# Altium PCB cs301_Team_15.PcbDoc
Units mm, origin at the board's own origin, x right, y up, seen from the top; angles counter-clockwise.
Board outline 87.88 x 127 mm, 2 copper layers (Top Layer, Bottom Layer); 44 components, 34 nets, 150 pads, 1 vias.
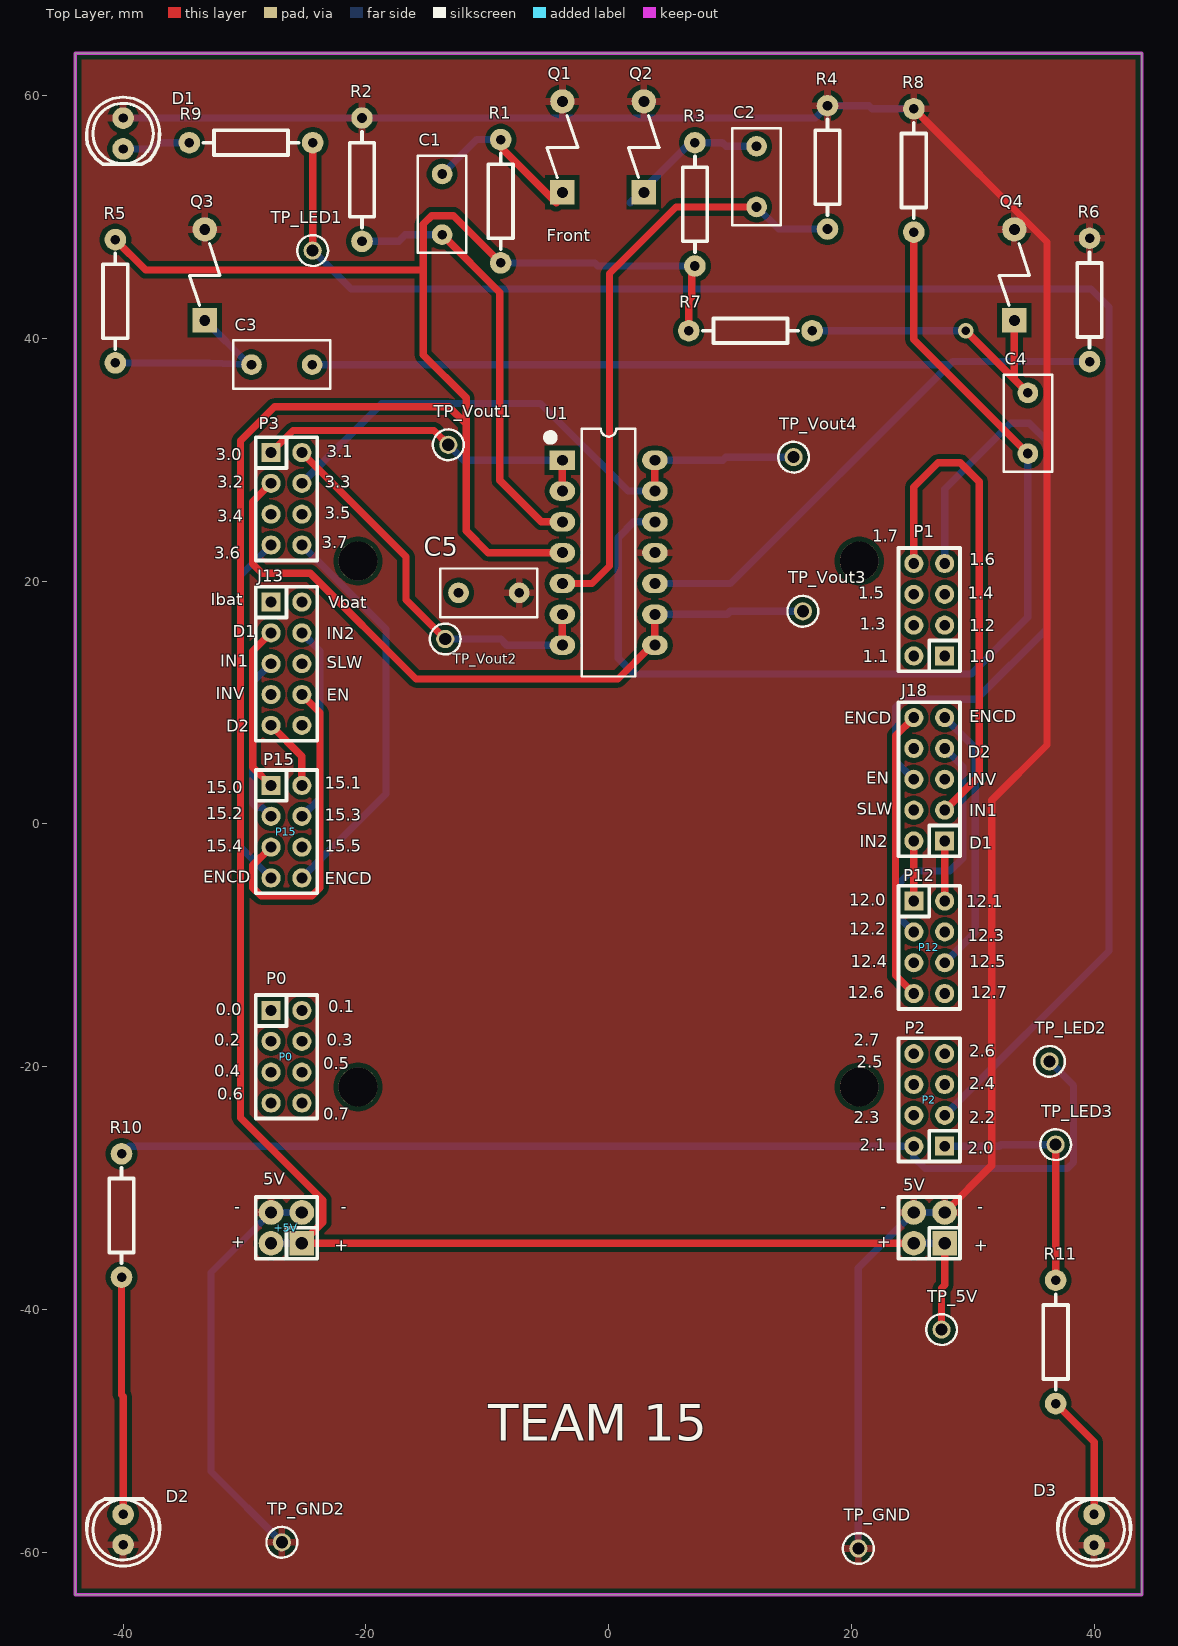
[diagram p0: Top Layer view]
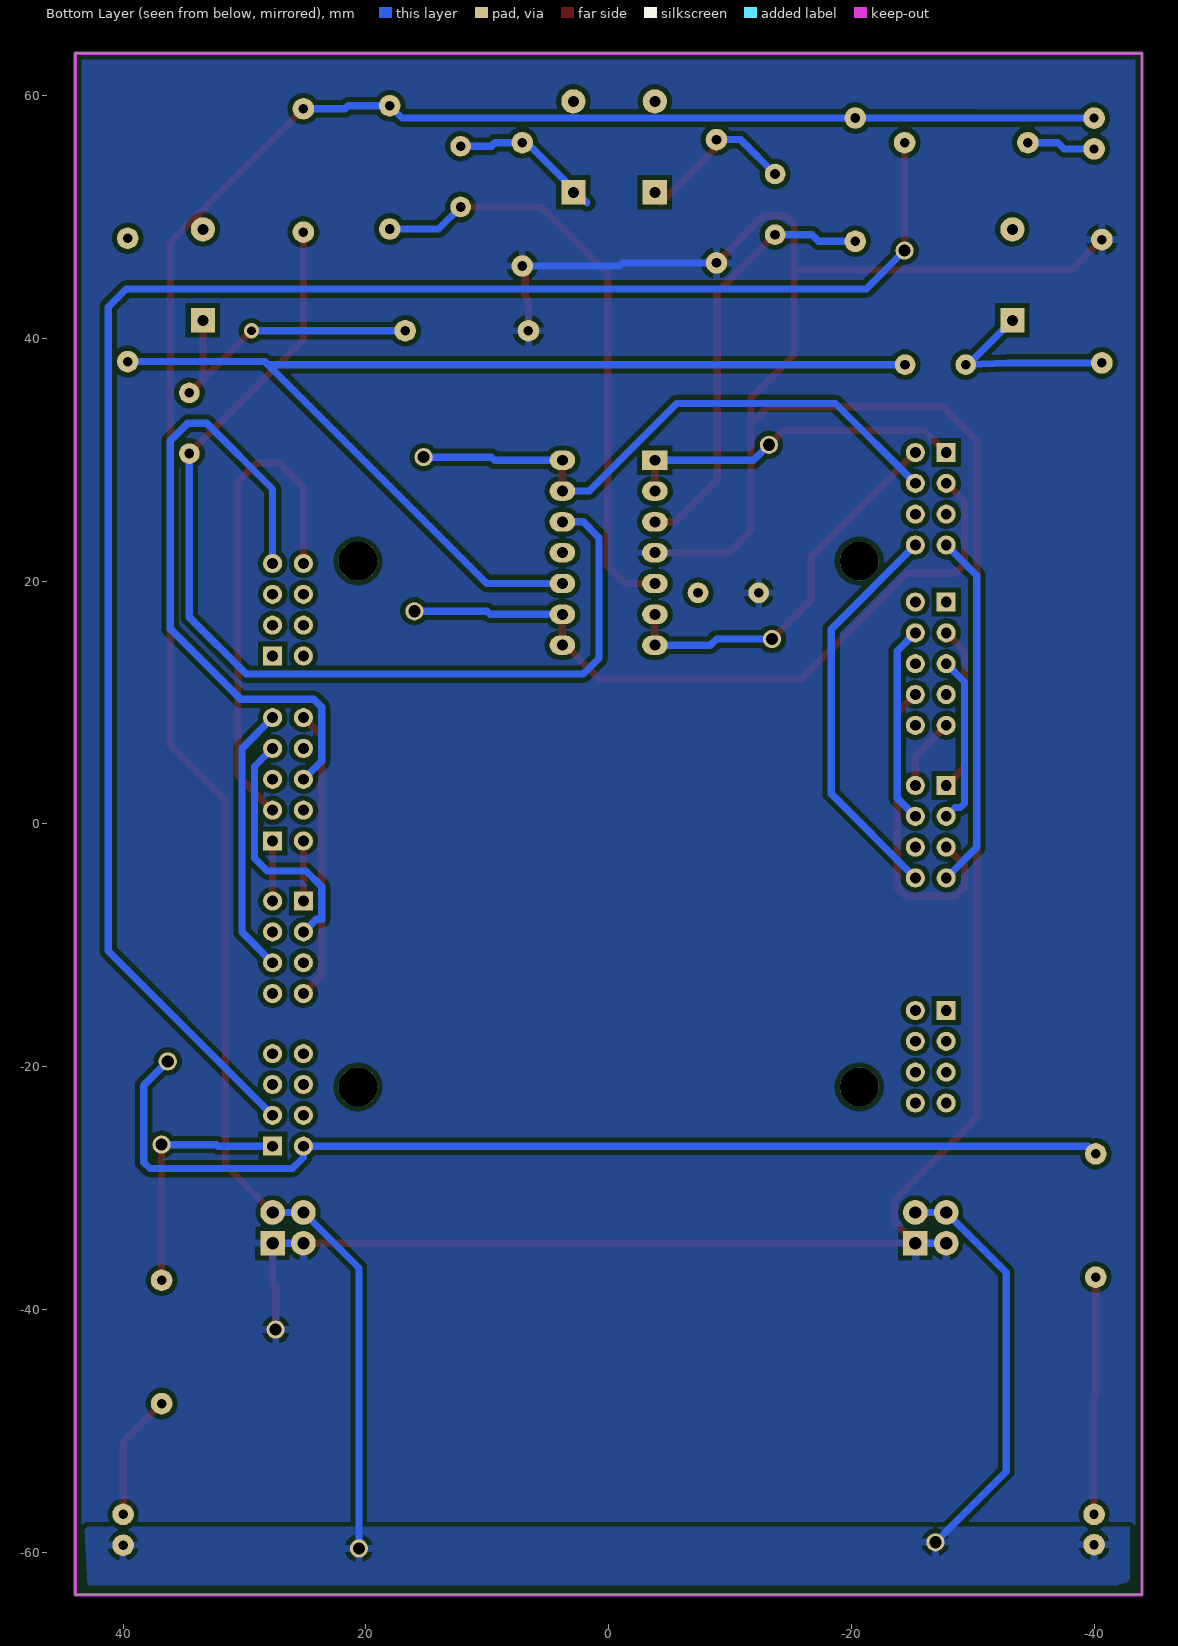
[diagram p1: Bottom Layer view, seen from below]

## Layer stack, top to bottom
Top Solder: solder mask 0.0102, Solder Resist, Dk 3.5
Top Layer: signal copper 0.0356
Dielectric1: dielectric 0.32, FR-4, Dk 4.8
Bottom Layer: signal copper 0.0356
Bottom Solder: solder mask 0.0102, Solder Resist, Dk 3.5

## Board outline
-43.942,-63.5 -43.942,63.5 43.942,63.5 43.942,-63.5

## Design rules (kind name [scope] priority, off if disabled: settings)
Clearance [All] p1: gap=0.4 ignorepadtopadclearanceinfootprint=FALSE
HoleSize [All] p1: absolutevalues=TRUE maxlimit=10 minlimit=0.4 maxpercent=80.000 minpercent=20.000
PolygonConnect [All] p1: connectstyle=Relief reliefconductorwidth=0.6 reliefentries=4 polygonreliefangle="90 Angle" airgapwidth=0.4
RoutingVias [All] p1: holewidth=0.711 width=1.27 viastyle="Through Hole" minholewidth=0.711 minwidth=1.27 maxholewidth=0.711 maxwidth=1.27
SilkToSilkClearance [All] p1: silktosilkclearance=0.1
SilkToSolderMaskClearance SilkscreenOverComponentPads [IsPad] p1: minsilkscreentomaskgap=0.1 clearancetoexposedcopper=TRUE
SolderMaskExpansion [All] p1: expansion=0.102 istentingtop=FALSE
Width [All] p1: maxlimit=10 minlimit=0.4 preferedwidth=0.6
27 further rules are at their usual default settings.

## Components (designator, comment, footprint, x,y, rotation, side; value= is the part's Value field where it differs from the comment)
5V "5V" IDC4 27.686,-34.544 r90 top locked
+5V "5V" IDC4 -25.273,-34.544 r90 top locked
C1 "100n" CCAP-5P0 -13.716,51.054 r270 top
C2 "100n" CCAP-5P0 12.192,53.34 r270 top
C3 "100n" CCAP-5P0 -26.924,37.846 r0 top
C4 "100n" CCAP-5P0 34.544,33.02 r270 top
C5 "1n" CCAP-5P0 -9.866,19.05 r0 top
D1 "LED" LED0.1/5MM#1 -40,55.62 r180 top locked
D2 "LED" LED0.1/5MM#2 -40,-56.88 r0 top locked
D3 "LED" LED0.1/5MM#1 40,-56.88 r0 top locked
J13 "CON10" IDC10 -27.813,18.288 r270 top locked
J18 "CON10" IDC10 27.686,-1.397 r90 top locked
P0 "P0" idc8 -27.813,-15.367 r270 top locked
P1 "P1" idc8 27.686,13.843 r90 top locked
P2 "P2" idc8 27.686,-26.543 r90 top locked
P3 "P3" idc8 -27.813,30.607 r270 top locked
P12 "P12" idc8 25.146,-6.35 r270 top locked
P15 "P15" IDC8 -27.813,3.175 r270 top locked
Q1 "VEMT3700" VEMT3700 0,49.501 r90 top
Q2 "VEMT3700" VEMT3700 6.708,49.501 r90 top
Q3 "VEMT3700" VEMT3700 -29.464,38.96 r90 top
Q4 "VEMT3700" VEMT3700 37.234,38.96 r90 top
R1 "51K" AXIAL0.4 -8.89,56.388 r270 top
R2 "33K" AXIAL0.4 -20.32,58.166 r270 top
R3 "51K" AXIAL0.4 7.112,56.134 r270 top
R4 "33K" AXIAL0.4 18.034,59.182 r270 top
R5 "51K" AXIAL0.4 -40.64,37.989 r90 top
R6 "33K" AXIAL0.4 39.624,48.26 r270 top
R7 "51K" AXIAL0.4 16.764,40.64 r180 top
R8 "33K" AXIAL0.4 25.146,58.928 r270 top
R9 "150" AXIAL0.4 -34.544,56.134 r0 top
R10 "150" AXIAL0.4 -40.132,-37.338 r90 top
R11 "150" AXIAL0.4 36.83,-37.592 r270 top
TP_5V "5003" TP_TH 27.432,-41.656 r90 top
TP_GND "5003" TP_TH 20.574,-59.69 r90 top
TP_GND2 "5003" TP_TH -26.924,-59.182 r90 top
TP_LED1 "5003" TP_TH -24.384,47.244 r90 top
TP_LED2 "5003" TP_TH 36.322,-19.558 r90 top
TP_LED3 "5003" TP_TH 36.83,-26.416 r90 top
TP_Vout1 "5003" TP_TH -13.208,31.242 r90 top
TP_Vout2 "5003" TP_TH -13.462,15.24 r90 top
TP_Vout3 "5003" TP_TH 16.002,17.526 r90 top
TP_Vout4 "5003" TP_TH 15.24,30.226 r90 top
U1 "LM324" DIP-14 0,22.352 r0 top

## Footprints (in the part's own frame and the unit in brackets; to place one, negate y for a bottom-side part, rotate by r counter-clockwise, add the part's x,y. Pads: shape width x height; smd on the part's side, far side on the other; paste and mask are expansions set on the pad)
AXIAL0.4 [mil]
  round 70 hole 31: 1(0,0) 2(400,0)
  silkscreen extent 45,-40 355,40
CCAP-5P0 [mm]
  round 1.7 hole 0.8: 1(-2.5,0) 2(2.5,0)
  silkscreen extent -4,-2 4,2, body extent -3.25,-1.5 3.25,1.5, height 6.5
DIP-14 [mm] "DIP; 14 Leads; Row Spacing 7.62 mm; Pitch 2.54 mm"
  rect 2.1x1.6 hole 0.9: 1(-3.81,7.62)
  oval 2.1x1.6 hole 0.9: 2(-3.81,5.08) 3(-3.81,2.54) 4(-3.81,0) 5(-3.81,-2.54) 6(-3.81,-5.08) 7(-3.81,-7.62) 8(3.81,-7.62) 9(3.81,-5.08) 10(3.81,-2.54) 11(3.81,0) 12(3.81,2.54) 13(3.81,5.08) 14(3.81,7.62)
  silkscreen extent -5.1,-10.2 2.2,10.2, body extent -5.07,-10.2 5.09,10.12, height 9.47
IDC4 [mil]
  rect 80x80 hole 40: 1(0,0)
  round 80 hole 40: 2(0,100) 3(100,0) 4(100,100)
  silkscreen extent -50,-50 150,150
idc8 [mil]
  rect 62x62 hole 35: 1(0,0)
  round 62 hole 35: 2(0,100) 3(100,0) 4(100,100) 5(200,0) 6(200,100) 7(300,0) 8(300,100)
  silkscreen extent -50,-50 350,150
IDC8 [mil]
  rect 62x62 hole 35: 1(0,0)
  round 62 hole 35: 2(0,100) 3(100,0) 4(100,100) 5(200,0) 6(200,100) 7(300,0) 8(300,100)
  silkscreen extent -50,-50 350,150
IDC10 [mil]
  rect 62x62 hole 35: 1(0,0)
  round 62 hole 35: 2(0,100) 3(100,0) 4(100,100) 5(200,0) 6(200,100) 7(300,0) 8(300,100) 9(400,0) 10(400,100)
  silkscreen extent -50,-50 450,150
LED0.1/5MM#1 [mil]
  round 70 hole 30: A(0,0) K(0,-100)
  silkscreen extent -118,-168 118,50
LED0.1/5MM#2 [mil]
  round 70 hole 30: A(0,0) K(0,-98.42)
  silkscreen extent -118,-168 118,50
TP_TH [mm] "Test Point, Through Hole, Dia 2.54mm"
  round 1.5 hole 1: 1(0,0)
  silkscreen extent -1.27,-1.27 1.27,1.27, body extent -1.27,-1.27 1.27,1.27, height 4.57
VEMT3700 [mm]
  rect 2x2 hole 0.9: 1(2.54,3.81)
  round 2 hole 0.9: 2(10.033,3.81)
  silkscreen extent 3.77,2.54 8.87,5.08

## Part data
5V +5V: library part CON4, "Connector"
C1 C2 C3 C4 C5: library part CerCap_TH_5P0, "TH ceramic capacitor with 5mm pitch"
J13 J18: "Connector"
P0 P1 P2 P3: library part CON8, "Connector"
P12 P15: library part CON8_1, "Connector"
Q1 Q2 Q3 Q4: "Silicon NPN Phototransistor"
R1 R2 R3 R4 R5 R6 R7 R8 R9 R10 R11: library part RES2
TP_5V TP_GND TP_GND2 TP_LED1 TP_LED2 TP_LED3 TP_Vout1 TP_Vout2 TP_Vout3 TP_Vout4: library part TestPoint, "Test Point, Orange, 1-Pin THD, RoHS", Forward Current="3 A", Forward Voltage="1.08 V", Max Operating Temperature="150 degC", Max Surge Current="80 A", Min Operating Temperature="-65 degC", Package Quantity=500, Peak Reverse Current="600 uA", ComponentLink1Description="Manufacturer URL", ComponentLink1URL=http://www.keyelco.com/, ComponentLink2Description=Datasheet, ComponentLink2URL=http://keyelco.com/userAssets/file/M65p56.pdf, DatasheetVersion=Jun-15, Diameter="5.3 mm", Height="0.25 inch", Length="9.5 mm", Mount="Through Hole", PackageDescription="1-Pin Through Hole Device, Dia 2.54 mm", PackageReference=5003, Packaging=Bulk, Pins=2, Radiation Hardening=No, REACH SVHC="No SVHC", RoHSCompliant=true, Weight="0.01 lb", Width="0.25 inch"
U1: library part LM324N_TH_DIP16, "IC OPAMP GP 14DIP", Current - Supply=1mA, Manufacturer="ON Semiconductor", Manufacturer Part Number=LM324N, Operating Temperature="0°C ~ 70°C", Package / Case="14-DIP (0.300\", 7.62mm)", Supplier Device Package=14-DIP, Supplier Part Number 1=LM324NFS-ND, Voltage - Supply, Single/Dual (±)="3 V ~ 32 V, ±1.5 V ~ 16 V", Amplifier Type="General Purpose", Base Part Number=LM324, Category="Integrated Circuits (ICs)", ComponentLink1Description=https://www.fairchildsemi.com/datasheets/LM/LM2902.pdf, ComponentLink1URL=https://www.fairchildsemi.com/datasheets/LM/LM2902.pdf, Mounting Type="Through Hole", Output Type=-, Packaging=Tube, Part Status=Active, Pricing 1="1=0.9, 10=0.775, 100=0.5789, 500=0.45482, 1000=0.35145 (NZD)", RoHS="RoHS Compliant", Slew Rate=-, Stock 1=2900, Supplier 1=Digi-Key

## Free pads (board coordinates)
  round 3.2 hole 3.2 unplated: 1(-20.65,-21.666) 1(-20.65,21.666) 1(20.65,-21.666) 1(20.65,21.666)

## Via types
v1: diameter 1.27, hole 0.711, Top Layer to Bottom Layer, 1 vias

## Nets (pads, with @x,y where several pads share a name; then routed paths per layer and width w, separated by ;. In a path a pad name is that pad's centre, name@x,y a point inside that pad or via, vN(x,y) a via of type N, cw(c..) or ccw(c..) an arc to the next point about the centre after c; other vN are vias at no path point)
+5V: 5V.1 5V.2 +5V.1 +5V.2 C5.1 R1.2 R3.2 R5.2 R7.2 TP_5V.1 U1.4 | length 244.1
  Top Layer w0.6: R5.2 -38.143,45.652 -15.268,45.652 ; R1.2 -12.784,50.122 -14.582,50.122 -15.268,49.436 -15.268,45.652 ; U1.4 -9.931,22.352 -11.738,24.159 -11.738,32.952 ; R7.2 6.604,43.162 6.858,43.416 R3.2@6.858,45.974 ; 5V.2 +5V.1 -23.549,-32.82 -23.549,-30.98 -30.33,-24.198 -30.33,31.58 -27.536,34.374 -13.16,34.374 -11.738,32.952 ; TP_5V.1 27.432,-38.245 27.686,-37.991 5V.1 ; -15.268,45.652 -15.268,38.641 -11.738,35.111 -11.738,32.952
  Bottom Layer w0.6: +5V.2 +5V.1 ; R1.2 -1.146,46.228 -0.892,45.974 R3.2@6.858,45.974 ; 5V.2 5V.1
D1A: J18.1 P12.2 | length 5
  Top Layer w0.6: P12.2 J18.1
D1B: J13.3 P15.1 | length 13.8
  Top Layer w0.6: P15.1 -29.314,4.676 -29.314,14.247 J13.3
D2A: J18.7 P12.3 | length 20.8
  Bottom Layer w0.6: P12.3 24.097,-7.841 23.645,-7.841 23.645,-5.174 24.94,-3.878 28.115,-3.878 29.173,-2.82 29.173,4.736 J18.7
D2B: J13.9 P15.2 | length 6
  Top Layer w0.6: J13.9 -25.273,5.588 P15.2
Enable: J18.6 P1.7 | length 54.6
  Bottom Layer w0.6: J18.6 23.645,5.184 23.645,9.609 24.305,10.269 30.299,10.269 36.116,16.086 36.116,31.58 34.668,33.028 33.119,33.028 27.686,27.595 P1.7
ENB: J13.8 P15.5 | length 26.6
  Top Layer w0.6: P15.5 -29.314,-3.406 -29.314,-5.25 -28.629,-5.936 -24.463,-5.936 -23.777,-5.25 -23.777,9.172 J13.8
ENCDA-1: J18.9 P12.6 | length 22.3
  Bottom Layer w0.6: P12.6 30.198,-8.918 30.198,6.251 J18.9
ENCDA-2: J18.10 P12.7 | length 24
  Top Layer w0.6: P12.7 23.645,-12.469 23.645,7.262 J18.10
ENCDB-1: P3.7 P15.7 | length 29.5
  Bottom Layer w0.6: P15.7 -30.33,-1.928 -30.33,20.47 P3.7
ENCDB-2: P3.8 P15.8 | length 33.2
  Bottom Layer w0.6: P15.8 -18.342,2.486 -18.342,16.056 P3.8
GND: 5V.3 5V.4 +5V.3 +5V.4 C5.2 D1.K D2.K D3.K Q1.2 Q2.2 Q3.2 Q4.2 R2.1 R4.1 R6.1 R8.1 TP_GND2.1 TP_GND.1 U1.11 | length 231
  Top Layer w0.6: R8.1 36.116,47.958 36.116,6.51 31.569,1.964 31.569,-28.121 5V.3
  Bottom Layer w0.6: D1.K -30.178,58.16 -30.172,58.166 R2.1 -4.318,58.166 1.778,58.166 17.018,58.166 R4.1 21.46,59.182 21.714,58.928 R8.1 ; TP_GND2.1 -32.766,-53.34 -32.766,-36.957 +5V.4 +5V.3 ; TP_GND.1 20.574,-36.576 5V.4 5V.3
IN1A: J18.3 P1.8 | length 41.4
  Top Layer w0.6: P1.8 25.146,27.77 27.13,29.754 28.976,29.754 30.528,28.202 30.528,3.985 J18.3
IN1B: J13.5 P15.3 | length 14.1
  Bottom Layer w0.6: P15.3 -28.532,1.354 -28.984,1.354 -29.314,1.684 -29.314,11.707 J13.5
IN2A: J18.2 P12.1 | length 5
  Top Layer w0.6: P12.1 J18.2
IN2B: J13.4 P15.4 | length 16.4
  Bottom Layer w0.6: P15.4 -23.777,2.131 -23.777,14.252 J13.4
LED1: P2.3 R9.2 TP_LED1.1 | length 148.6
  Top Layer w0.6: TP_LED1.1 R9.2
  Bottom Layer w0.6: TP_LED1.1 -21.217,44.077 39.748,44.077 41.221,42.604 41.221,-10.468 P2.3
LED2: P2.2 R10.2 TP_LED2.1 | length 89.4
  Bottom Layer w0.6: R10.2 -39.497,-26.543 P2.2 25.146,-27.475 26.06,-28.389 37.792,-28.389 38.3,-27.881 38.3,-21.536 TP_LED2.1
LED3: P2.1 R11.1 TP_LED3.1 | length 20.4
  Top Layer w0.6: R11.1 TP_LED3.1
  Bottom Layer w0.6: P2.1 32.179,-26.543 32.306,-26.416 TP_LED3.1
NetC1_1: C1.1 Q1.1 R1.1 | length 13.1
  Top Layer w0.6: R1.1 -8.89,55.753 Q1.1@-4.318,51.181
  Bottom Layer w0.6: C1.1 -10.882,56.388 R1.1
NetC1_2: C1.2 R2.2 U1.3 | length 35.6
  Top Layer w0.6: C1.2 -8.959,43.797 -8.959,28.311 -5.54,24.892 U1.3
  Bottom Layer w0.6: R2.2 -17.3,48.006 -16.752,48.554 C1.2
NetC2_1: C2.1 Q2.1 R3.1 | length 12.6
  Bottom Layer w0.6: 1.778,51.181 2.768,52.171 6.731,56.134 6.858,56.134 9.37,56.134 9.664,55.84 C2.1
NetC2_2: C2.2 R4.2 U1.5 | length 49.6
  Top Layer w0.6: U1.5 -1.374,19.812 0.073,21.26 0.073,45.36 5.553,50.84 C2.2
  Bottom Layer w0.6: C2.2 14.01,49.022 R4.2
NetC3_1: C3.1 Q3.1 R5.1 | length 16.6
  Bottom Layer w0.6: R5.1 -32.912,37.989 C3.1@-29.629,37.854 ; Q3.1 C3.1@-29.629,37.854 ; C3.1@-29.629,37.854 -29.62,37.846 C3.1 C3.1@-29.629,37.854
NetC3_2: C3.2 R6.2 U1.10 | length 95.9
  Bottom Layer w0.6: C3.2 -24.424,37.828 28.064,37.828 ; U1.10 10.048,19.812 28.064,37.828 ; R6.2 28.336,38.1 28.064,37.828
NetC4_1: C4.1 Q4.1 R7.1 | length 24.8
  Top Layer w0.6: v1(29.424,40.64) 33.424,36.64 ; Q4.1 33.424,36.64 ; C4.1 33.424,36.64
  Bottom Layer w0.6: R7.1 v1(29.424,40.64)
NetC4_2: C4.2 R8.2 U1.12 | length 85.4
  Top Layer w0.6: R8.2 25.146,39.918 C4.2
  Bottom Layer w0.6: U1.12 2.08,24.892 0.785,23.597 0.785,13.648 2.08,12.352 29.868,12.352 34.544,17.029 C4.2
NetD1_A: D1.A R9.1 | length 5.7
  Bottom Layer w0.6: D1.A -37.544,55.62 -37.03,56.134 R9.1
NetD2_A: D2.A R10.1 | length 19.6
  Top Layer w0.6: R10.1 -40.132,-47.053 -40,-47.185 D2.A
NetD3_A: D3.A R11.2 | length 10.4
  Top Layer w0.6: R11.2 40,-50.922 D3.A
Vout1: P3.1 TP_Vout1.1 U1.1 U1.2 | length 28.3
  Top Layer w0.6: P3.1 -26.002,32.418 -14.384,32.418 TP_Vout1.1 ; U1.2 U1.1
  Bottom Layer w0.6: TP_Vout1.1 -11.938,29.972 U1.1
Vout2: P3.2 TP_Vout2.1 U1.6 U1.7 | length 32.7
  Top Layer w0.6: P3.2 -16.691,22.025 -16.691,18.469 TP_Vout2.1 ; U1.7 U1.6
  Bottom Layer w0.6: TP_Vout2.1 -8.893,15.24 -8.385,14.732 U1.7
Vout3: P3.3 TP_Vout3.1 U1.8 U1.9 | length 60.3
  Top Layer w0.6: P3.3 -29.314,26.566 -29.314,21.42 -28.552,20.658 -24.59,20.658 -15.878,11.946 0.767,11.946 3.553,14.732 U1.8 U1.9
  Bottom Layer w0.6: U1.9 9.776,17.272 10.03,17.526 TP_Vout3.1
Vout4: P3.4 TP_Vout4.1 U1.13 U1.14 | length 48.9
  Top Layer w0.6: U1.13 U1.14
  Bottom Layer w0.6: P3.4 -18.687,34.653 -5.616,34.653 1.605,27.432 U1.13 ; U1.14 9.395,29.972 9.649,30.226 TP_Vout4.1
pads on no net: J13.1 J13.2 J13.6 J13.7 J13.10 J18.4 J18.5 J18.8 P0.1 P0.2 P0.3 P0.4 P0.5 P0.6 P0.7 P0.8 P1.1 P1.2 P1.3 P1.4 P1.5 P1.6 P2.4 P2.5 P2.6 P2.7 P2.8 P3.5 P3.6 P12.4 P12.5 P12.8 P15.6

## Polygon pours and split planes (outlines as drawn)
+5V on Bottom Layer "+5V_L02_P002" (solid, pour order 2): -43.942,63.5 -43.942,-63.5 43.942,-63.5 43.942,63.5
GND on Bottom Layer "GND_L02_P000" (solid, pour order 0): -42.926,-62.23 -42.926,-61.976 -42.926,-57.912 42.926,-57.912 43.18,-58.166 42.926,-62.738 -41.91,-62.738 -42.672,-62.484
GND on Top Layer "GND_L01_P001" (solid, pour order 1): -43.942,63.5 -43.942,-63.5 43.942,-63.5 43.942,63.5

## Keep-outs
Keep-Out Layer:
  the board outline again, w0.254

## Silkscreen, mask and mechanical layers (free items; w line width, h text height)
Top Overlay:
  text "Front" at -5.08,48.006 h1
  text "3.1" at -23.241,30.226 h1
  text "3.0" at -32.385,29.972 h1
  text "3.2" at -32.258,27.686 h1
  text "3.3" at -23.368,27.686 h1
  text "3.5" at -23.368,25.146 h1
  text "3.4" at -32.258,24.892 h1
  text "1.7" at 21.717,23.241 h1
  text "3.7" at -23.622,22.733 h1
  text "3.6" at -32.512,21.844 h1
  text "1.6" at 29.718,21.336 h1
  text "1.5" at 20.574,18.542 h1
  text "1.4" at 29.591,18.542 h1
  text "Ibat" at -32.766,18.034 h1
  text "Vbat" at -23.114,17.78 h1
  text "1.3" at 20.701,16.002 h1
  text "1.2" at 29.718,15.875 h1
  text "D1" at -30.988,15.367 h1
  text "IN2" at -23.241,15.24 h1
  text "1.1" at 20.955,13.335 h1
  text "1.0" at 29.718,13.335 h1
  text "IN1" at -32.004,12.954 h1
  text "SLW" at -23.241,12.827 h1
  text "INV" at -32.385,10.287 h1
  text "EN" at -23.241,10.16 h1
  text "ENCD" at 29.718,8.382 h1
  text "ENCD" at 19.431,8.255 h1
  text "D2" at -31.496,7.62 h1
  text "D2" at 29.591,5.461 h1
  text "EN" at 21.209,3.302 h1
  text "INV" at 29.591,3.175 h1
  text "15.1" at -23.368,2.921 h1
  text "15.0" at -33.147,2.54 h1
  text "SLW" at 20.447,0.762 h1
  text "IN1" at 29.718,0.635 h1
  text "15.2" at -33.147,0.381 h1
  text "15.3" at -23.368,0.254 h1
  text "IN2" at 20.701,-1.905 h1
  text "D1" at 29.718,-2.032 h1
  text "15.4" at -33.147,-2.286 h1
  text "15.5" at -23.368,-2.286 h1
  text "ENCD" at -33.401,-4.826 h1
  text "ENCD" at -23.368,-4.953 h1
  text "12.0" at 19.812,-6.731 h1
  text "12.1" at 29.464,-6.858 h1
  text "12.2" at 19.812,-9.144 h1
  text "12.3" at 29.591,-9.652 h1
  text "12.4" at 19.939,-11.811 h1
  text "12.5" at 29.718,-11.811 h1
  text "12.6" at 19.685,-14.351 h1
  text "12.7" at 29.845,-14.351 h1
  text "0.1" at -23.114,-15.494 h1
  text "0.0" at -32.385,-15.748 h1
  text "0.2" at -32.512,-18.288 h1
  text "0.3" at -23.241,-18.288 h1
  text "2.7" at 20.193,-18.288 h1
  text "2.6" at 29.718,-19.177 h1
  text "2.5" at 20.447,-20.066 h1
  text "0.5" at -23.495,-20.193 h1
  text "0.4" at -32.512,-20.828 h1
  text "2.4" at 29.718,-21.844 h1
  text "0.6" at -32.258,-22.733 h1
  text "0.7" at -23.495,-24.384 h1
  text "2.3" at 20.193,-24.638 h1
  text "2.2" at 29.718,-24.638 h1
  text "2.1" at 20.701,-26.924 h1
  text "2.0" at 29.591,-27.178 h1
  text "-" at -30.353,-31.242 h1 r180
  text "-" at -21.59,-31.242 h1 r180
  text "-" at 22.86,-31.242 h1 r180
  text "-" at 30.861,-31.242 h1 r180
  text "+" at -30.099,-35.052 h1 r90
  text "+" at 23.114,-35.052 h1 r90
  text "+" at -21.59,-35.306 h1 r90
  text "+" at 31.115,-35.306 h1 r90
  text "TEAM 15" at -9.906,-50.8 h3